# EAGLE board airowl (EAGLE 6.5.0)
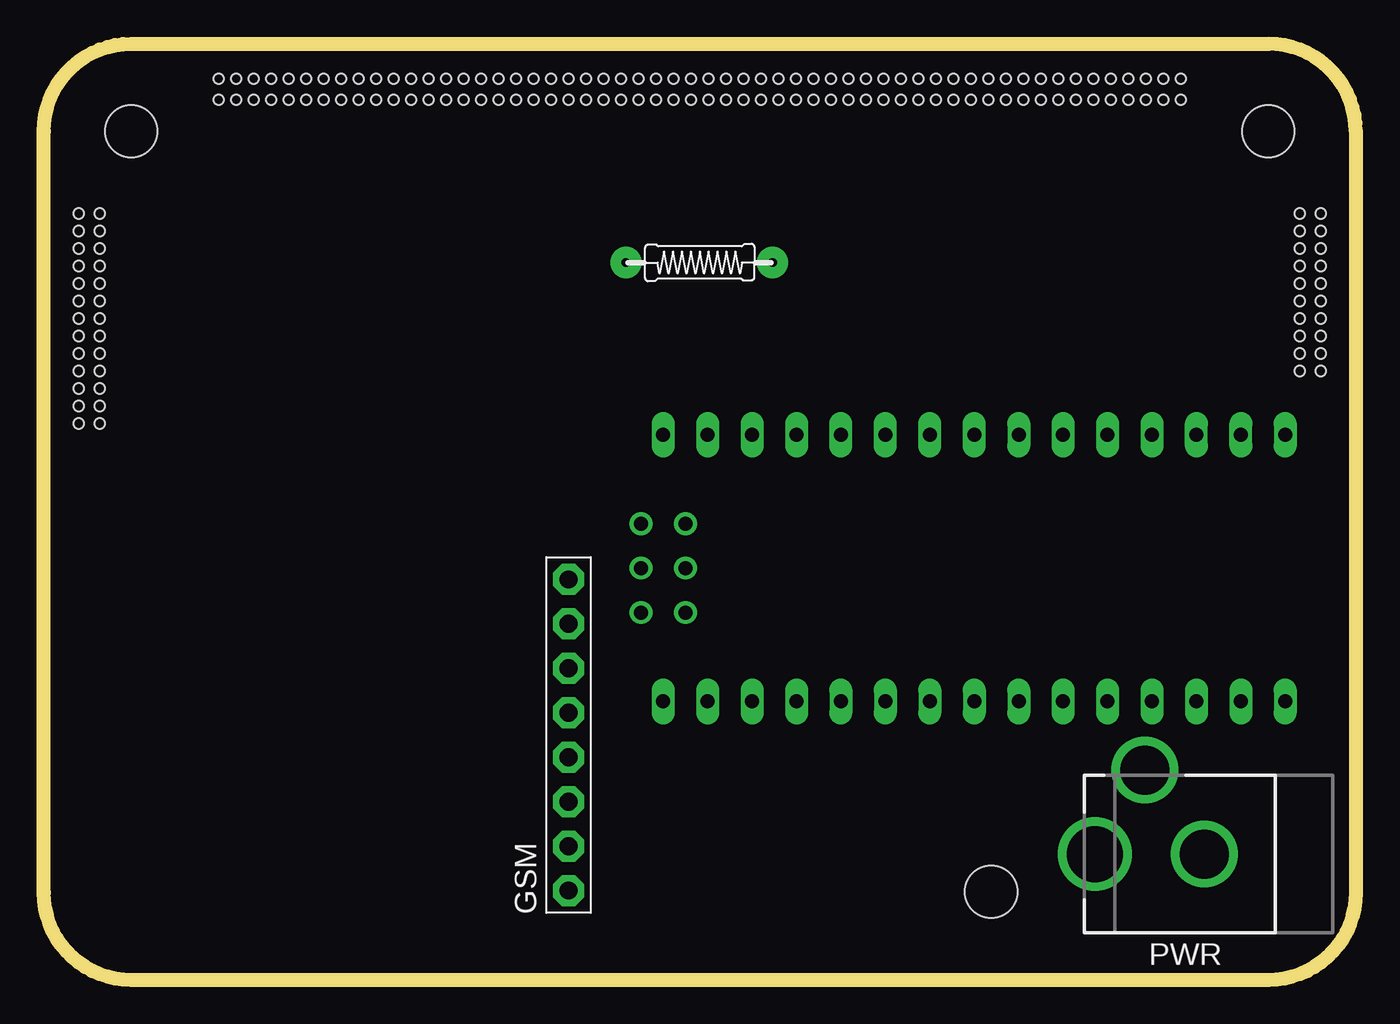
[diagram p0: board, top side]
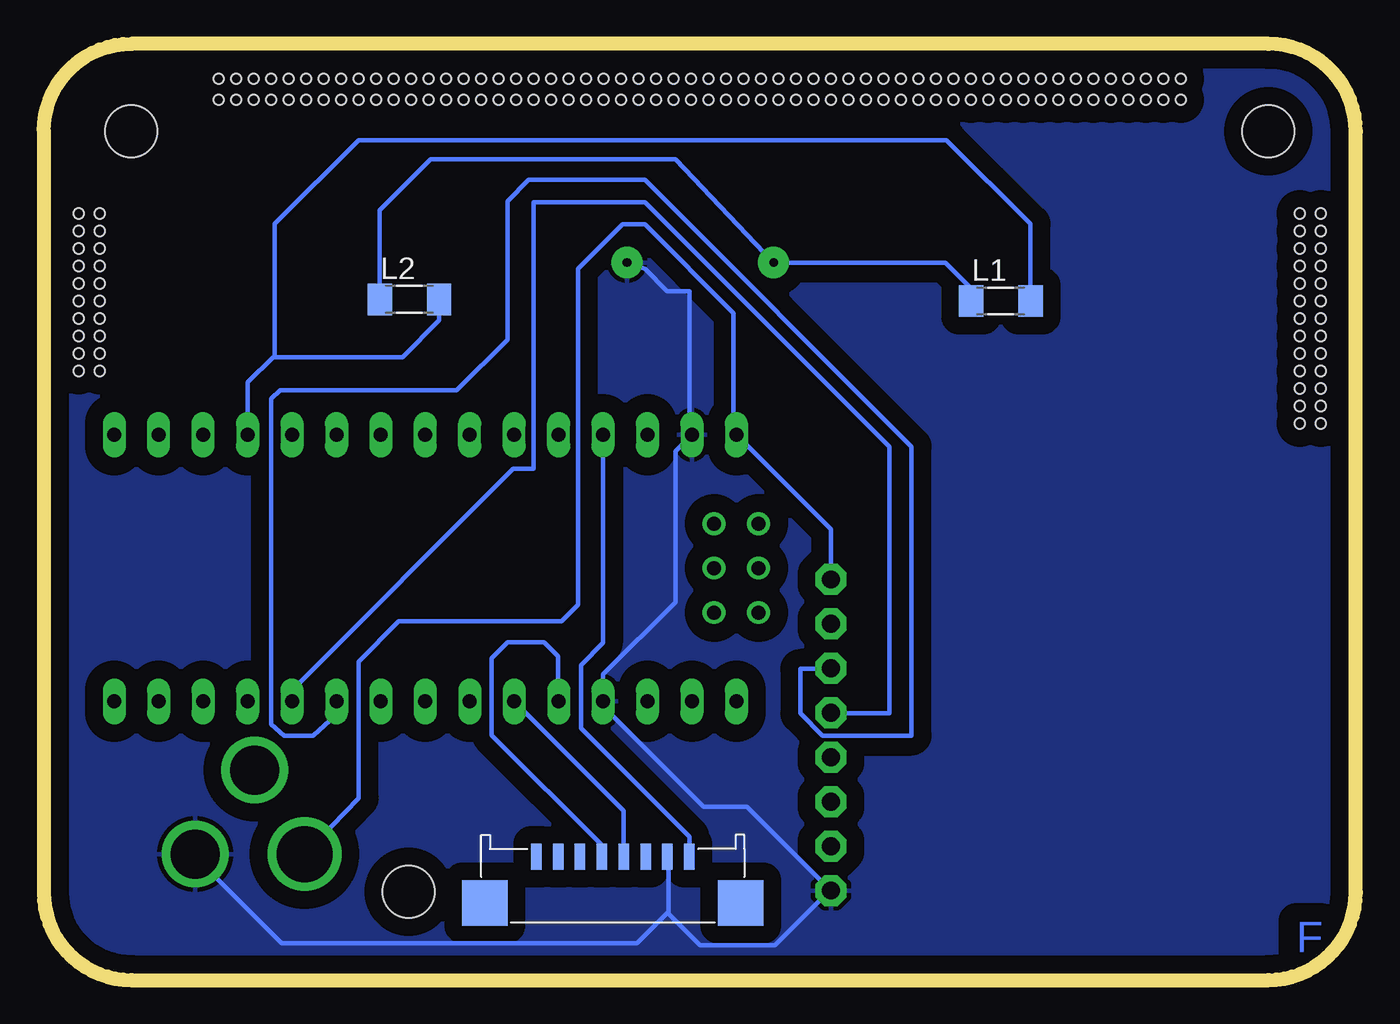
[diagram p1: board, bottom side, seen from below]

Size 75 x 53.5 mm. Coordinates in mm from the lower left corner, seen from the top.
Outline: 0,5 0,48.5 arc-90 5,53.5 70,53.5 arc-90 75,48.5 75,5 arc-90 70,0 5,0 arc-90 0,5
Copper layers (1*16): Top 0.035mm / dielectric 1.5mm / Bottom 0.035mm
Design rules "default": minimum track width 10mil, minimum drill 24mil, track to track 8mil, track to pad 8mil, pad to pad 8mil, via to via 8mil, smd to smd 8mil, copper to edge 40mil, drill to drill 8mil, minimum pad ring 10mil, minimum via ring 8mil, stop-mask expansion 4mil, vias tented up to drill 0mil, thermal gap 10mil
Holes 3 mm at 54.15,5.05 5,48.5 70,48.5
Holes 0.6 mm at 2,43.8 3.2,43.8 2,42.8 3.2,42.8 3.2,41.8 2,41.8 3.2,40.8 2,40.8 3.2,39.8 2,39.8 3.2,38.8 2,38.8 2,37.8 3.2,37.8 3.2,36.8 2,36.8 3.2,35.8 2,35.8 3.2,34.8 2,34.8 2,33.8 3.2,33.8 3.2,32.8 2,32.8 2,31.8 3.2,31.8 10,50.3 10,51.5 11,50.3 11,51.5 12,51.5 12,50.3 13,51.5 13,50.3 14,51.5 14,50.3 15,51.5 15,50.3 16,50.3 16,51.5 17,51.5 17,50.3 18,51.5 18,50.3 19,51.5 19,50.3 20,50.3 20,51.5 21,51.5 21,50.3 22,50.3 22,51.5 23,50.3 23,51.5 24,50.3 24,51.5 25,50.3 25,51.5 26,51.5 26,50.3 27,51.5 27,50.3 28,51.5 28,50.3 29,51.5 29,50.3 30,50.3 30,51.5 31,51.5 31,50.3 32,51.5 32,50.3 33,51.5 33,50.3 34,50.3 34,51.5 35,51.5 35,50.3 36,50.3 36,51.5 37,50.3 37,51.5 38,50.3 38,51.5 39,50.3 39,51.5 40,51.5 40,50.3 41,51.5 41,50.3 42,51.5 42,50.3 43,51.5 43,50.3 44,50.3 44,51.5 45,51.5 45,50.3 46,51.5 46,50.3 47,51.5 47,50.3 48,50.3 48,51.5 49,51.5 49,50.3 50,50.3 50,51.5 51,51.5 51,50.3 52,51.5 52,50.3 53,51.5 53,50.3 54,51.5 54,50.3 55,51.5 55,50.3 56,51.5 56,50.3 57,51.5 57,50.3 58,51.5 58,50.3 59,51.5 59,50.3 60,51.5 60,50.3 61,51.5 61,50.3 62,51.5 62,50.3 63,51.5 63,50.3 64,51.5 64,50.3 65,51.5 65,50.3 71.8,43.8 73,43.8 71.8,42.8 73,42.8 73,41.8 71.8,41.8 73,40.8 71.8,40.8 73,39.8 71.8,39.8 73,38.8 71.8,38.8 71.8,37.8 73,37.8 73,36.8 71.8,36.8 73,35.8 71.8,35.8 73,34.8 71.8,34.8

## Footprints (pad centres in the part's own frame; a part is rotated, then mirrored left to right if it is on the bottom)
NANO = drill 0.8 long: 3.3V -10.16,24.13; 5V -10.16,-1.27; A0 -10.16,19.05; A1 -10.16,16.51; A2 -10.16,13.97; A3 -10.16,11.43; A4 -10.16,8.89; A5 -10.16,6.35; A6 -10.16,3.81; A7 -10.16,1.27; AREF -10.16,21.59; D2 5.08,1.27; D3 5.08,3.81; D4 5.08,6.35; D5 5.08,8.89; D6 5.08,11.43; D7 5.08,13.97; D8 5.08,16.51; D9 5.08,19.05; D10 5.08,21.59; D11 5.08,24.13; D12 5.08,26.67; D13 -10.16,26.67; GND -10.16,-6.35; GND1 5.08,-1.27; RAW -10.16,-8.89; RST -10.16,-3.81; RST1 5.08,-3.81; RX1 5.08,-6.35; TX0 5.08,-8.89 | drill 0.8: ICSP1 -5.08,-10.16; ICSP2 -5.08,-7.62; ICSP3 -2.54,-10.16; ICSP4 -2.54,-7.62; ICSP5 0,-10.16; ICSP6 0,-7.62
WINSEN_CONNECTOR = smd 2.6 x 2.6: P$1 0.2,1.1; P$10 14.85,1.1 | smd 0.6 x 1.5: P$2 3.15,3.75; P$3 4.4,3.75; P$4 5.65,3.75; P$5 6.9,3.75; P$6 8.15,3.75; P$7 9.4,3.75; P$8 10.65,3.75; P$9 11.9,3.75
RESISTER(HORIZONTAL) = drill 0.5 pad 1.778: 1 -4.159,0; 2 4.223,0
1X08-BIG = drill 1.016 pad 1.778 octagon: 1 -8.89,0; 2 -6.35,0; 3 -3.81,0; 4 -1.27,0; 5 1.27,0; 6 3.81,0; 7 6.35,0; 8 8.89,0
M3516 = smd 1.4 x 1.8: 1 -1.7,0; 2 1.7,0
DCJACK_2MM_PTH = drill 2.8: GND 0,7.35; GNDBREAK 4.8,10.75 | drill 3.2: PWR 0,13.6

## Placement (x,y rotation side)
E$1  [NANO]  44.3,21 270 top
E$2  [WINSEN_CONNECTOR]  50,3.3 0 bottom
E$6  [RESISTER(HORIZONTAL)]  37.5,41 180 top
GSM  [1X08-BIG]  30,14 90 top
L1  [M3516]  20.3,38.8 0 bottom
L2  [M3516]  54.1,38.9 0 bottom
PWR  [DCJACK_2MM_PTH]  73.69,7.2 90 top

## Library data of the parts
E$1 = Arduino-clone
E$2 = Wnisen
E$6 = ROBOCON
GSM L1 L2 PWR = adafruit

## Nets
GND: E$1.GND E$1.GND1 E$2.P$8 E$6.1 GSM.1 PWR.GND
PWR: E$1.RAW GSM.8 PWR.PWR
S$1: E$1.A0 L1.2 L2.2
S$2: E$6.2 L1.1 L2.1
S$3: E$1.A1
S$4: E$1.5V E$2.P$9
S$8: E$1.D7 GSM.6
S$9: E$1.D8 GSM.5
S$10: E$1.D3 E$2.P$6
S$11: E$1.D2 E$2.P$5

## Tracks (layer width: path | path; a pad name or v marks a point on that pad's centre or on a via)
GND
  Bottom 0.254: E$6.1 40.64,40.64 39.37,39.37 38.1,39.37 38.1,31.75 E$1.GND 38.9,30.21 38.9,21.6 43.03,17.47 E$1.GND1 43.03,15.63 37.3,9.9 34.79,9.9 GSM.1 30.09,5.11 33.2,2 37.5,2 39.3,3.8 | 39.3,3.8 39.35,3.85 41.1,2.1 61.4,2.1 66.34,7.04 PWR.GND | 39.3,3.8 39.3,6.6 E$2.P$8
  pour Bottom (isolate 1.016): -0.6,-0.6 -0.6,54.1 75.6,54.1 75.6,-0.7 -0.6,-0.7
PWR
  Bottom 0.254: GSM.8 30,25.75 E$1.RAW 35.56,31.75 35.56,38.1 40.64,43.18 41.91,43.18 44.45,40.64 44.45,21.45 45.4,20.5 54.7,20.5 57,18.2 57,10.39 PWR.PWR
S$1
  Bottom 0.254: 61.8,35.6 54.5,35.6 52.4,37.7 L2.2 | 61.8,35.6 61.9,35.6 63.35,34.15 E$1.A0 | 61.8,35.6 61.8,43.2 57,48 23.4,48 18.6,43.2 L1.2
S$2
  Bottom 0.254: L1.1 22,39.53 23.47,41 E$6.2 38.88,46.9 52.9,46.9 55.8,44 L2.1
S$4
  Bottom 0.254: E$1.5V 43.03,19.27 44.3,18 44.3,14.4 38.1,8.2 38.1,7.7 38,7.05 E$2.P$9
S$5
  Bottom 0.254: 52.88,39.05 52.9,39.03
S$8
  Bottom 0.254: E$1.D7 58.32,15.14 59.59,13.97 61.26,13.97 62,14.61 62,33.2 61.5,33.7 51.4,33.7 48.5,36.6 48.5,44.5 47.28,45.72 40.64,45.72 25.4,30.48 25.4,13.97 30.48,13.97 31.75,15.24 31.75,17.78 30.48,17.78 GSM.6
S$9
  Bottom 0.254: E$1.D8 60.86,16.51 48.16,29.21 46.99,29.21 46.99,44.45 40.64,44.45 26.67,30.48 26.67,15.24 29.21,15.24 GSM.5
S$10
  Bottom 0.254: E$2.P$6 41.85,9.66 E$1.D3
S$11
  Bottom 0.254: E$2.P$5 43.1,7.7 49.4,14 49.4,18.4 48.5,19.3 46.4,19.3 45.6,18.5 45.6,15.95 E$1.D2

## Text on the board
Bottom: F